# Altium PCB PCB1.PcbDoc
Units mm, origin at the board's own origin, x right, y up, seen from the top; angles counter-clockwise.
Board outline 152.4 x 101.6 mm, 2 copper layers (Top Layer, Bottom Layer); 8 components, 4 nets, 16 pads, 20 vias.
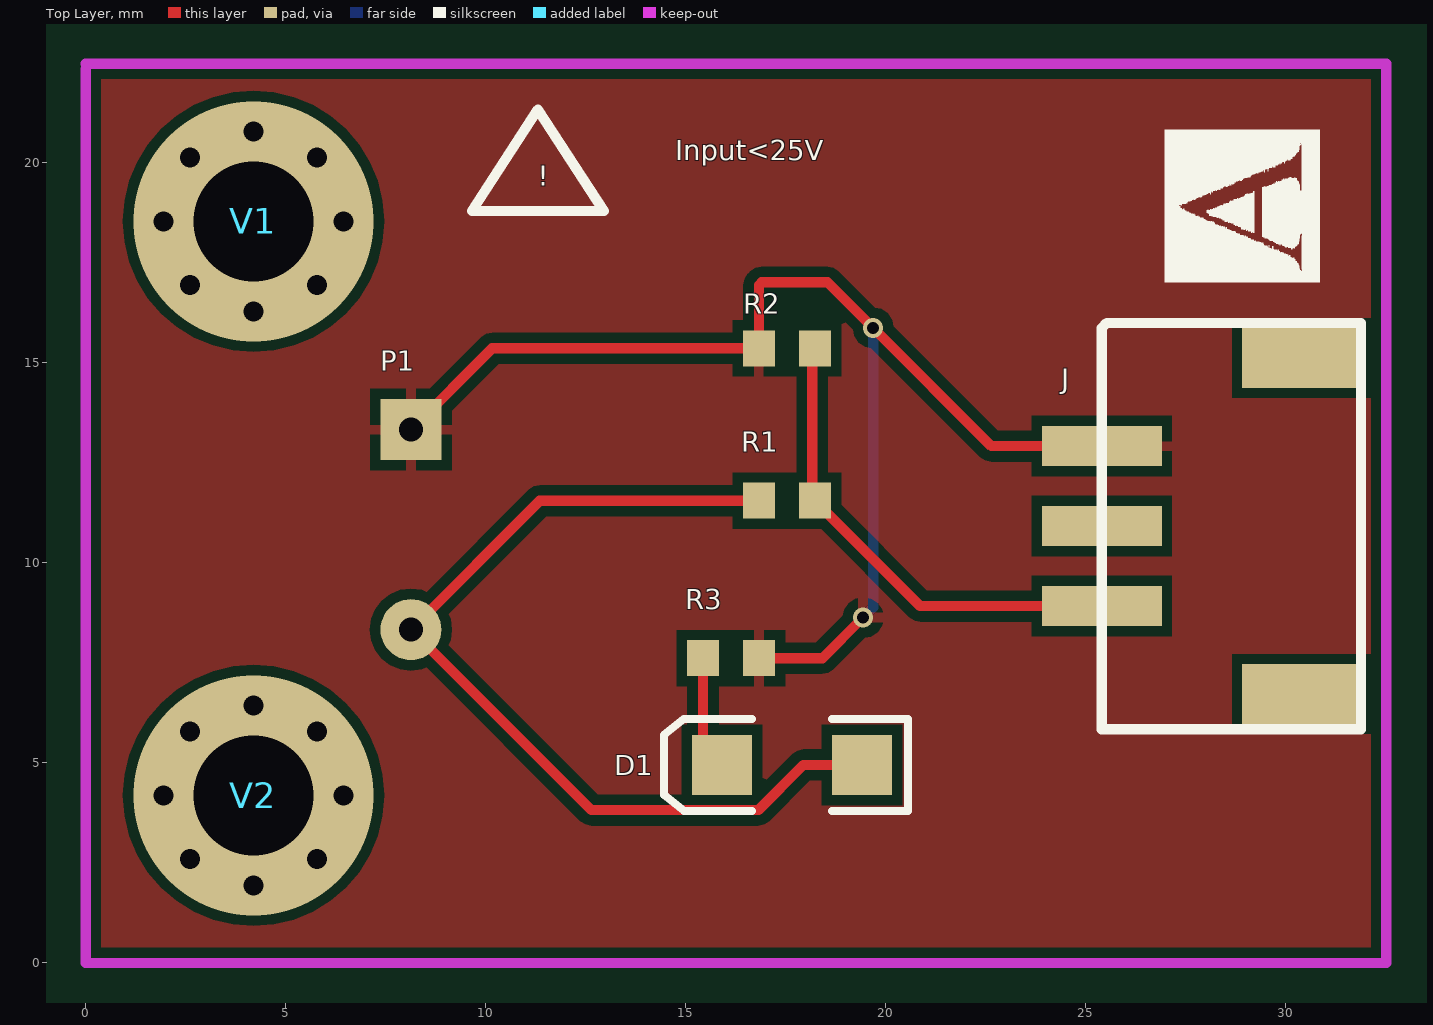
[diagram p0: Top Layer view]
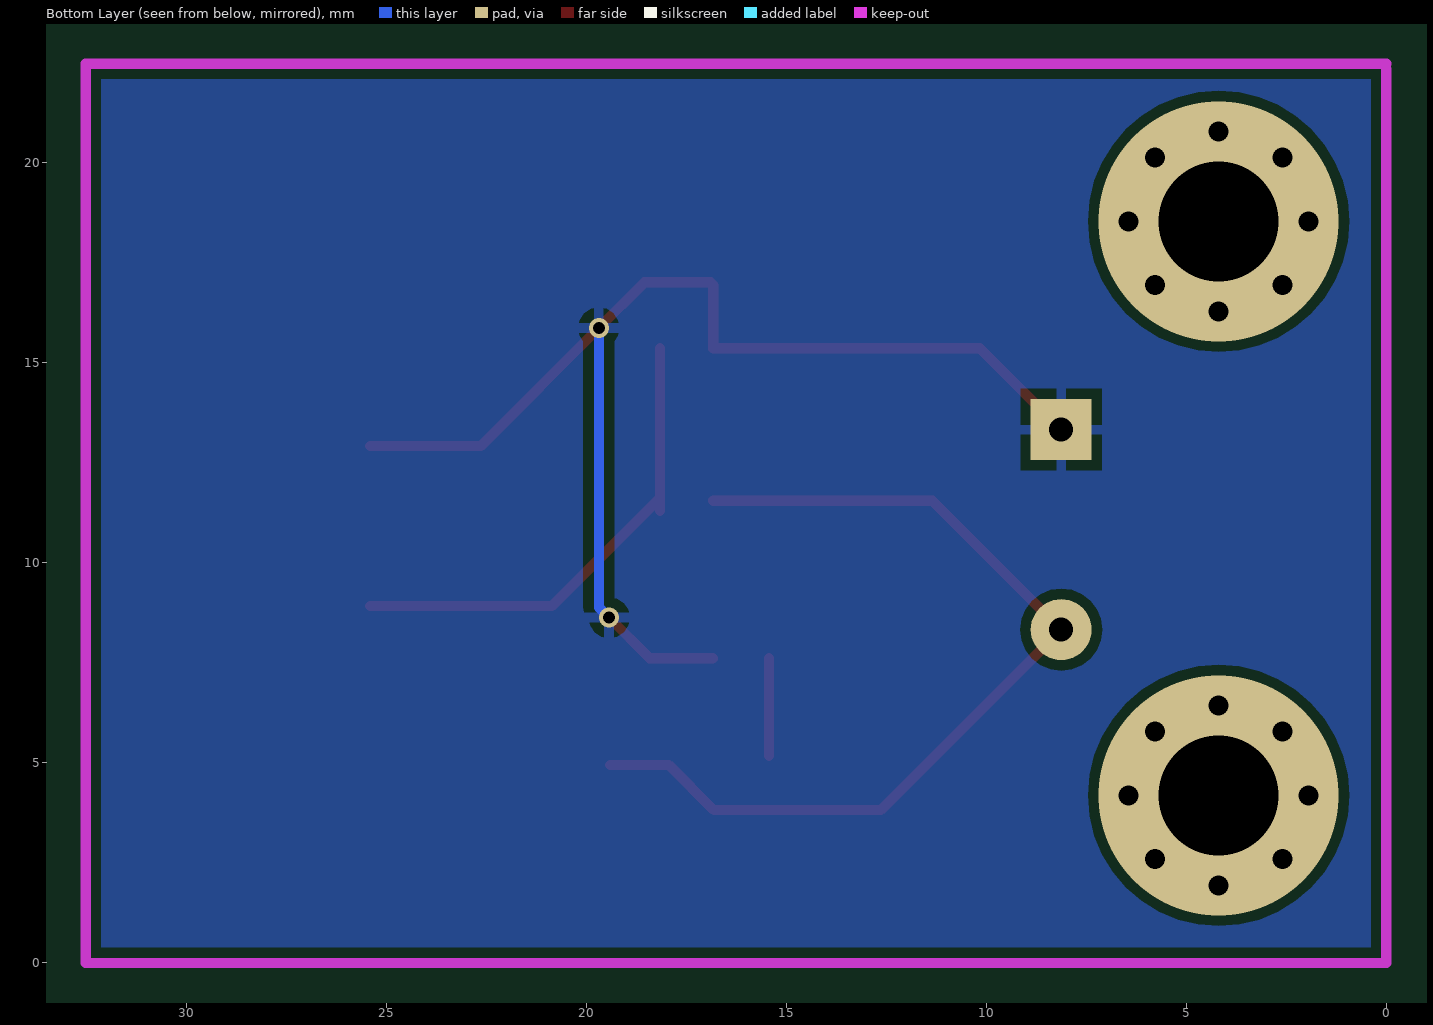
[diagram p1: Bottom Layer view, seen from below]

## Layer stack, top to bottom
Top Layer: signal copper 0.0356
Dielectric: dielectric 0.32, FR-4, Dk 4.8
Bottom Layer: signal copper 0.0356

## Board outline
-83.312,-49.276 69.088,-49.276 69.088,52.324 -83.312,52.324

## Design rules (kind name [scope] priority, off if disabled: settings)
Clearance [All] p1: gap=0.254
PolygonConnect [All] p1: connectstyle=Relief reliefconductorwidth=0.254 reliefentries=4 polygonreliefangle="90 Angle"
RoutingVias [All] p1: holewidth=0.711 width=1.27 viastyle="Through Hole" minholewidth=0.711 minwidth=1.27 maxholewidth=0.711 maxwidth=1.27
SilkscreenOverComponentPads [All] p1: minsilkscreentomaskgap=0.254
SolderMaskExpansion [All] p1: expansion=0.102
Width [All] p1: maxlimit=0.254 minlimit=0.254 preferedwidth=0.254
27 further rules are at their usual default settings.

## Components (designator, comment, footprint, x,y, rotation, side; value= is the part's Value field where it differs from the comment)
D1 "LED2" 3.2X1.6X1.1 17.653,4.953 r180 top
J "sh-2.0" sh-2.0 25.4,10.922 r90 top
P1 "Header 2" DIP2 8.128,13.335 r270 top
R1 "30K" 1608[0603] 17.526,11.557 r0 top
R2 "7.5K" 1608[0603] 17.526,15.367 r180 top
R3 "470" 1608[0603] 16.129,7.62 r0 top
V1 "Via" VIA 4.191,18.542 r0 top
V2 "Via" VIA 4.191,4.191 r0 top

## Footprints (in the part's own frame and the unit in brackets; to place one, negate y for a bottom-side part, rotate by r counter-clockwise, add the part's x,y. Pads: shape width x height; smd on the part's side, far side on the other; paste and mask are expansions set on the pad)
3.2X1.6X1.1 [mm] "SMT LED; 2 Flat Leads"
  rect 1.5x1.5 smd: 1(-1.75,0) 2(1.75,0)
  silkscreen extent -2.9,-1.15 3.2,1.15
1608[0603] [mm] "Chip Capacitor, Body 1.6x0.8mm, IPC High Density"
  rect 0.8x0.9 smd: 1(-0.7,0) 2(0.7,0)
  body extent -0.87,-0.48 0.87,0.48, height 1.3
DIP2 [mil]
  rect 60x60 hole 23.62: 1(0,0)
  round 60 hole 23.62: 2(196.85,0)
sh-2.0 [mm]
  rect 1x3 smd: 1(-2,0) 2(0,0) 3(2,0) 3(2,0)
  rect 1.5x3 smd: GND(-4.2,-5) GND(4.2,-5)
  silkscreen extent -5.08,-6.48 5.08,0
VIA [mm]

## Part data
D1: "Typical RED, GREEN, YELLOW, AMBER GaAs LED"
P1: "Header, 2-Pin"
R1 R2 R3: library part RES

## Via types
v1: diameter 1, hole 0.5, Top Layer to Bottom Layer, 16 vias
v2: diameter 6, hole 3, Top Layer to Bottom Layer, 2 vias
v3: diameter 0.5, hole 0.3, Top Layer to Bottom Layer, 2 vias

## Nets (pads, with @x,y where several pads share a name; then routed paths per layer and width w, separated by ;. In a path a pad name is that pad's centre, name@x,y a point inside that pad or via, vN(x,y) a via of type N, cw(c..) or ccw(c..) an arc to the next point about the centre after c; other vN are vias at no path point)
GND: J.3 P1.1 R2.2 R3.2 | length 31.7
  Top Layer w0.254: P1.1 10.16,15.367 R2.2 16.826,16.953 ; R3.2 18.415,7.62 v3(19.431,8.636) ; 16.891,17.018 18.542,17.018 v3(19.685,15.875) 22.638,12.922 J.3@25.4,12.922
  Bottom Layer w0.254: v3(19.431,8.636) 19.685,8.89 v3(19.685,15.875)
NetD1_1: D1.1 P1.2 R1.1 | length 23.6
  Top Layer w0.254: R1.1 11.35,11.557 P1.2 12.641,3.822 16.811,3.822 17.942,4.953 D1.1
NetD1_2: D1.2 R3.1 | length 2.4
  Top Layer w0.254: D1.2@15.429,5.179 R3.1
NetJ_3: J.1 R1.2 R2.1 | length 12.3
  Top Layer w0.254: R1.2@18.161,11.303 R2.1@18.161,15.367 ; R1.2 20.861,8.922 J.1
pads on no net: J.2 J.GND
copper on no net:
  other v1: 4.191,1.941 2.6,2.6 5.782,2.6 1.941,4.191 6.441,4.191 2.6,5.782 5.782,5.782 4.191,6.441 4.191,16.292 2.6,16.951 5.782,16.951 1.941,18.542 6.441,18.542 2.6,20.133 5.782,20.133 4.191,20.792
  other v2: 4.191,4.191 4.191,18.542

## Polygon pours and split planes (outlines as drawn)
GND on Top Layer "Top Layer-No Net" (solid, pour order 4): 0,0 0,22.479 32.512,22.479 32.512,0
GND on Bottom Layer "Top Layer-No Net" (solid, pour order 6): 0,22.352 32.385,22.352 32.512,22.479 32.512,0 0,0

## Keep-outs
Keep-Out Layer:
  lines w0.254: 0,22.352 0,0 32.512,0 32.512,22.479 0,22.479

## Silkscreen, mask and mechanical layers (free items; w line width, h text height)
Top Overlay:
  drawing of 1208 lines, arcs and shapes, not listed
  text "Input<25V" at 14.732,20.066 h0.5
  text "!" at 11.303,19.431 h0.5
Top Solder:
  text "Analog Voltage Divider" at 8.636,1.27 h1